# EAGLE board imu shield (EAGLE 7.3.0)
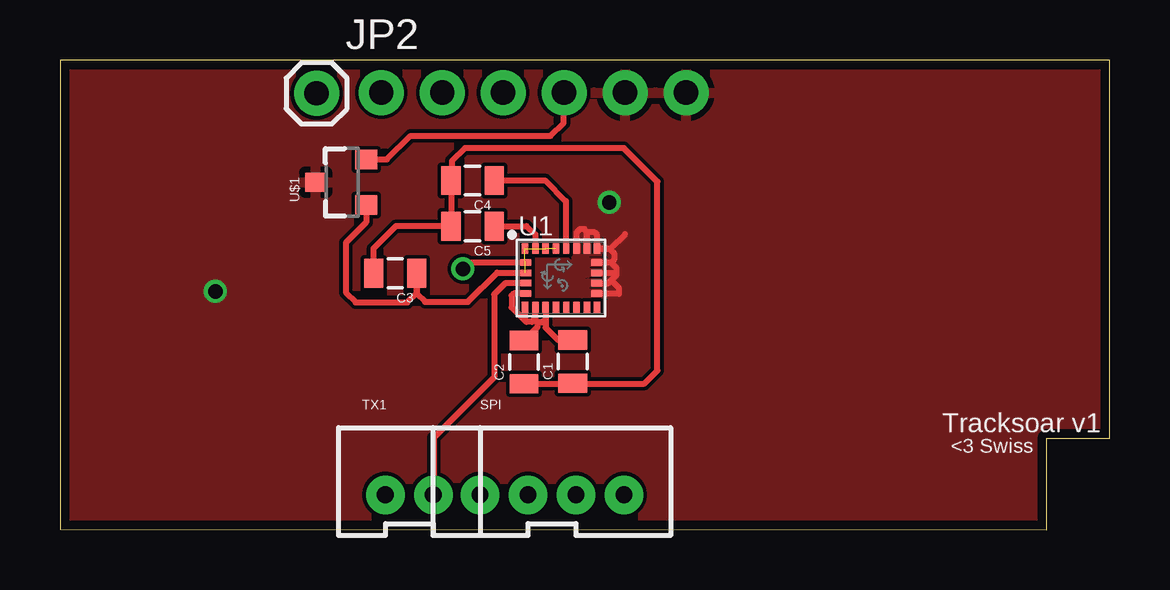
[diagram p0: board, top side]
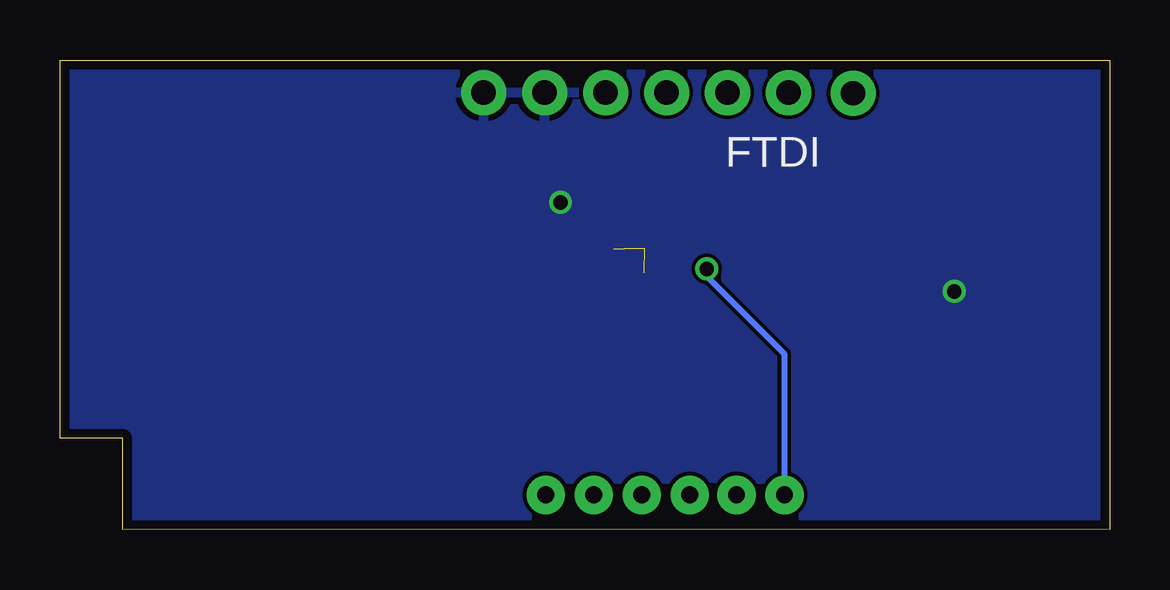
[diagram p1: board, bottom side, seen from below]

Size 43.74 x 19.57 mm. Coordinates in mm from the lower left corner, seen from the top.
Outline: 41.12,0 0,0.03 0,19.57 43.74,19.57 43.74,3.81 41.12,3.81 41.12,0.03
Copper layers (1*16): Top 0.0356mm / dielectric 1.5011mm / Bottom 0.0356mm
Design rules "oshpark-2layer": minimum track width 6mil, minimum drill 13mil, track to track 6mil, track to pad 6mil, pad to pad 6mil, via to via 6mil, smd to smd 6mil, copper to edge 15mil, drill to drill 6mil, minimum pad ring 7mil, minimum via ring 7mil, stop-mask expansion 4mil, vias tented up to drill 0mil, thermal gap 10mil

## Footprints (pad centres in the part's own frame; a part is rotated, then mirrored left to right if it is on the bottom)
0805 = smd 0.8 x 1.2: 1 -0.9,0; 2 0.9,0
1X06_NO_SILK = drill 1.016 pad 1.88: 1 0,0; 2 2.54,0; 3 5.08,0; 4 7.62,0; 5 10.16,0; 6 12.7,0
1X01 = drill 1.016 pad 1.88: 1 0,0
JST-4-PTH-VERT = drill 0.7 pad 1.6: 1 -3,-0.55; 2 -1,-0.55; 3 1,-0.55; 4 3,-0.55
JST-2-PTH-VERT = drill 0.7 pad 1.6: 1 -1,-0.55; 2 1,-0.55
LGA24-8X4 = smd 0.27 x 0.45: 1 -1.505,1.225; 6 -1.505,-1.225; 7 -1.075,-1.225; 8 -0.645,-1.225; 9 -0.215,-1.225; 10 0.215,-1.225; 11 0.645,-1.225; 12 1.075,-1.225; 13 1.505,-1.225; 18 1.505,1.225; 19 1.075,1.225; 20 0.645,1.225; 21 0.215,1.225; 22 -0.215,1.225; 23 -0.645,1.225; 24 -1.075,1.225 | smd 0.45 x 0.27: 2 -1.475,0.645; 3 -1.475,0.215; 4 -1.475,-0.215; 5 -1.475,-0.645; 14 1.475,-0.645; 15 1.475,-0.215; 16 1.475,0.215; 17 1.475,0.645
SOT23-3 = smd 0.8 x 0.9: 1 -0.95,-1; 2 0.95,-1; 3 0,1.1

## Placement (x,y rotation side)
C1  10uf  [0805]  21.36,7.01 90 top
C2  .1uf  [0805]  19.33,6.99 90 top
C3  .1uf  [0805]  13.97,10.69 180 top
C4  10nf  [0805]  17.2,14.55 180 top
C5  .1uf  [0805]  17.2,12.65 180 top
FRAME1  FRAME-LETTER  [CREATIVE_COMMONS]  14.78,-7.8 0 top  (outside the outline)
FTDI  [1X06_NO_SILK]  13.39,18.21 180 bottom
JP2  [1X01]  10.69,18.19 0 top
SPI  [JST-4-PTH-VERT]  20.5,2.01 0 top
TX1  TX  [JST-2-PTH-VERT]  14.55,2.01 0 top
U1  LSM9DS1  [LGA24-8X4]  20.88,10.49 0 top
U$1  LM3480IM4  [SOT23-3]  11.76,14.48 90 top

## Library data of the parts
C1-C5 = SparkFun-Passives
FRAME1 = SparkFun-Aesthetics
FTDI = SparkFun-Connectors; PROD_ID: CONN-08437
JP2 SPI TX1 = SparkFun-Connectors
U1 = SparkFun-Sensors; PROD_ID: IC-12536
U$1 = SparkFun-PowerIC

## Nets
3V: C1.2 C2.2 U1.5 U1.6 U1.7 U1.8
!RESET: JP2.1
C1: C5.1 U1.24
CAP: C4.1 U1.21
DTR: FTDI.1
GND: FTDI.5 FTDI.6 U1.14 U1.15 U1.16 U1.17 U1.18 U1.19 U1.20 U$1.3
MISO: SPI.2
MOSI: SPI.3
N$1: C1.1 C2.1 C3.2 C4.2 C5.2
RXO: FTDI.2
SCK: SPI.1
SCL: TX1.1 U1.2
SDA: TX1.2 U1.4
SS: SPI.4
TXO: FTDI.3
VCC: FTDI.4 U$1.2
VDD: C3.1 U1.1 U1.3 U1.22 U1.23 U$1.1

## Tracks (layer width: path | path; a pad name or v marks a point on that pad's centre or on a via)
3V
  Top 0.254: U1.8 20.23,8.78 | 20.23,8.78 20.09,8.64 19.89,8.64 | 19.89,8.64 19.81,8.71 U1.7 19.8,8.81 19.66,8.66 19.43,8.66 19.38,8.71 | 19.38,8.71 U1.6 | 19.89,8.64 19.89,8.44 C2.2 | 20.23,8.78 20.23,8.42 20.75,7.9 C1.2 | U1.5 18.91,9.85 18.82,9.75 18.82,9.27 19.38,8.71
C1
  Top 0.254: C5.1 19.43,12.65 19.81,12.29 19.81,11.73 U1.24
CAP
  Top 0.254: C4.1 20.22,14.55 21.08,13.69 21.08,11.73 U1.21
GND  (via drill 0.6)
  Top 0.254: 23.55,12.32 22.94,11.71 U1.18 | U1.18 22.38,12.29 22.28,12.4 21.95,12.4 U1.19 21.95,12.41 21.84,12.52 21.67,12.52 21.51,12.37 21.51,11.73 U1.20 | U1.18 22.91,11.72 23.09,11.53 23.09,11.25 22.96,11.13 | 22.96,11.13 U1.17 | U1.16 23.1,10.71 23.19,10.62 | 23.19,10.62 23.19,10.9 22.96,11.13 | U1.15 22.85,10.28 22.96,10.39 | 22.96,10.39 23.19,10.62 | U1.14 23.28,9.85 23.29,9.83 23.29,10.06 22.96,10.39
  other vias: 22.89,13.64 6.48,9.93
  pour Top: 0,19.58 43.74,19.58 43.74,0 0,0.03 0.05,3.78
  pour Bottom: 0,19.58 43.74,19.58 43.74,0 0,0.03 0.05,3.78
N$1
  Top 0.254: C3.2 13.06,10.71 13.06,11.71 14,12.65 C5.2 C4.2 16.33,14.59 16.33,15.37 16.87,15.9 23.5,15.9 24.89,14.5 24.89,6.63 24.35,6.08 C2.1 21.34,6.08 C1.1
SCL  (via drill 0.6)
  Top 0.254: U1.2 17.05,11.14 v16.79,10.87
  Bottom 0.254: v16.79,10.87 16.79,10.57 13.56,7.34 TX1.1
SDA
  Top 0.254: U1.4 18.56,10.28 18.08,9.8 18.08,6.35 15.57,3.84 15.57,1.47 TX1.2
VCC
  Top 0.254: U$1.2 13.62,15.43 14.61,16.41 20.45,16.41 20.98,16.94 20.98,18.19 FTDI.4
VDD  (3 unrouted)
  Top 0.254: U$1.1 12.76,12.81 11.91,11.96 11.91,9.88 12.32,9.47 14.48,9.47 14.86,9.86 14.86,10.68 C3.1 14.87,9.84 15.21,9.5 16.99,9.5 18.21,10.72 19.39,10.72 U1.3 19.39,10.69

## Text on the board
tNames: Tracksoar v1 | <3 Swiss